# Altium PCB shy-mirror-sensor-revA.PcbDoc
Units mil, origin at the board's own origin, x right, y up, seen from the top; angles counter-clockwise.
Board outline 375 x 590 mil, 2 copper layers (Top Layer, Bottom Layer); 2 components, 6 nets, 14 pads, 0 vias.
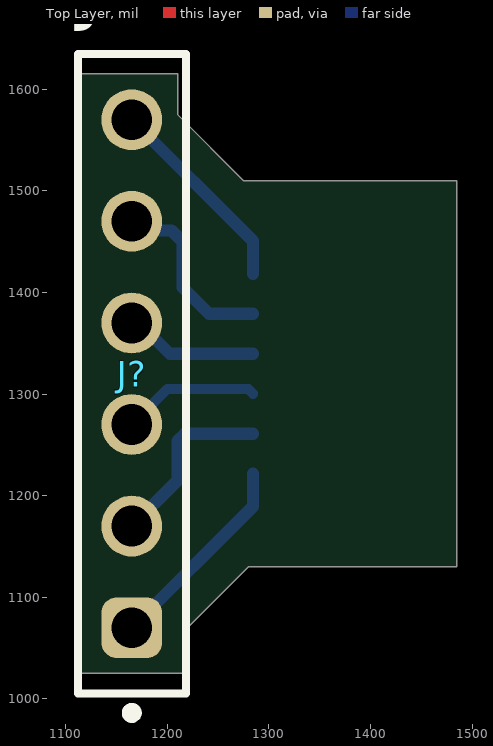
[diagram p0: Top Layer view]
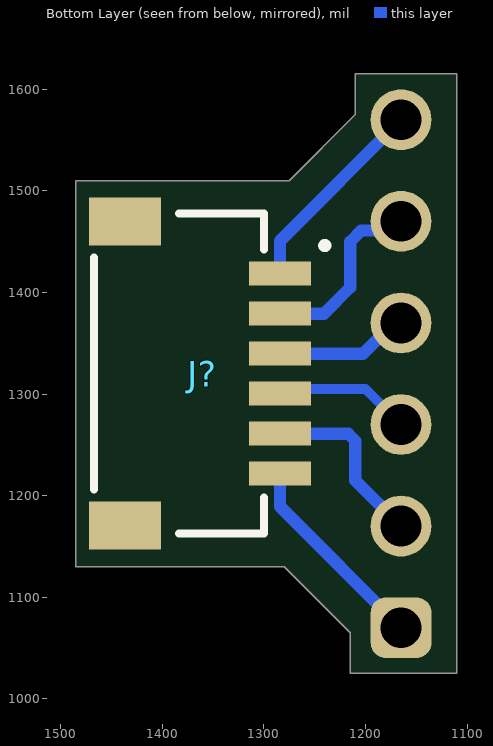
[diagram p1: Bottom Layer view, seen from below]

## Layer stack, top to bottom
Top Solder: solder mask 0.4, Solder Resist, Dk 3.5
Top Layer: signal copper 1.4
Dielectric 1: dielectric 12.6, FR-4, Dk 4.8
Bottom Layer: signal copper 1.4
Bottom Solder: solder mask 0.4, Solder Resist, Dk 3.5

## Board outline
1110,1025 1110,1615 1210,1615 1210,1575 1275,1510 1485,1510 1485,1130 1280,1130 1215,1065 1215,1025

## Design rules (kind name [scope] priority, off if disabled: settings)
Clearance [All] p1: gap=10 ignorepadtopadclearanceinfootprint=FALSE except(0: Arc-Hole Track-Hole SMDPad-Hole THPad-Hole Via-Hole Fill-Hole Poly-Hole Region-Hole Text-Hole)
PolygonConnect [All] p1: connectstyle=Relief reliefconductorwidth=10 reliefentries=4 polygonreliefangle="90 Angle" airgapwidth=10
RoutingVias [All] p1: holewidth=28 width=50 viastyle="Through Hole" minholewidth=12 minwidth=24 maxholewidth=28 maxwidth=50
SolderMaskExpansion [All] p1: expansion=4 istentingtop=FALSE
Width [All] p1: maxlimit=50 minlimit=10 preferedwidth=12 minimp=50.000000 maximp=50.000000 favimp=50.000000
30 further rules are at their usual default settings.

## Classes and differential pairs
component class shy-mirror-sensor-rev: J?

## Components (designator, comment, footprint, x,y, rotation, side; value= is the part's Value field where it differs from the comment)
J? "61300611821" 61300611821 1165,1320 r90 top
J? "SM06B-SRSS-TB__LF__SN_" SM06B-SRSS-TB 1300,1320 r270 bottom

## Footprints (in the part's own frame and the unit in brackets; to place one, negate y for a bottom-side part, rotate by r counter-clockwise, add the part's x,y. Pads: shape width x height; smd on the part's side, far side on the other; paste and mask are expansions set on the pad)
61300611821 [mm] "Socket Header, Pitch 2.54 mm, THT, Vertical, single row, 6p"
  rrect50% 1.52x1.52 hole 1.02: 1(-6.35,0)
  round 1.52 hole 1.02: 2(-3.81,0) 3(-1.27,0) 4(1.27,0) 5(3.81,0) 6(6.35,0)
  silkscreen extent -8.6,-1.35 8,1.35, body extent -7.87,-1.25 7.87,1.25, height 8.55
SM06B-SRSS-TB [mm]
  rect 0.6x1.55 smd: 1(-2.5,0.4) 2(-1.5,0.4) 3(-0.5,0.4) 4(0.5,0.4) 5(1.5,0.4) 6(2.5,0.4)
  rect 1.2x1.8 smd: 7(3.8,-3.475) 8(-3.8,-3.475)
  silkscreen extent -4,-4.25 4,1.59, body extent -4,-4.18 4,0.77, height 2.96

## Part data
J?: "WR-PHD Socket Header, THT, Vertical, pitch 2.54mm, 1 Row, 6P", Contact Resistance=20mOhm, Manufacturer="Wurth Elektronik", Operating Temperature Max=125°C, Operating Temperature Min=-40°C, Rated Current=3A, Withstanding Voltage=500V, Working Voltage=250V, Category="Board-to-Board Connectors", ComponentLink1Description="Website Link", ComponentLink1URL=https://www.we-online.com/redexpert/article/61300611821?ad, ComponentLink2Description="Datasheet Link", ComponentLink2URL=https://www.we-online.com/redexpert/spec/61300611821?ad, Gender="Socket Header", Manufacturer Part Number=61300611821, Match Code=WR-PHD, Mount="Through Hole", Number of Pins=6, Number of Rows=1, Orientation=Vertical, Packaging=Tray, Pitch=2.54mm
J?: "Connector", Manufacturer_Name="JST (JAPAN SOLDERLESS TERMINALS)", Manufacturer_Part_Number="SM06B-SRSS-TB (LF)(SN)", Datasheet Link=http://uk.rs-online.com/web/p/products/5468827

## Nets (pads, with @x,y where several pads share a name; then routed paths per layer and width w, separated by ;. In a path a pad name is that pad's centre, name@x,y a point inside that pad or via, vN(x,y) a via of type N, cw(c..) or ccw(c..) an arc to the next point about the centre after c; other vN are vias at no path point)
GND: J?.2@1165,1170 J?.5@1284.25,1260.94 | length 179.7
  Bottom Layer w12: J?.2@1165,1170 1210,1215 1210,1253.92 1217.03,1260.94 J?.5@1284.25,1260.94
INT: J?.2@1284.25,1379.06 J?.5@1165,1470 | length 183.3
  Bottom Layer w12: J?.5@1165,1470 1174.15,1460.85 1204.15,1460.85 1215,1450 1215,1405 1240.94,1379.06 J?.2@1284.25,1379.06
SCL: J?.3@1284.25,1339.68 J?.4@1165,1370 | length 131.8
  Bottom Layer w12: J?.4@1165,1370 1172.14,1370 1202.46,1339.68 J?.3@1284.25,1339.68
SDA: J?.3@1165,1270 J?.4@1284.25,1300.32 | length 135.7
  Bottom Layer w10: J?.3@1165,1270 1200,1305 1279.57,1305 J?.4@1284.25,1300.32
VIN: J?.1@1165,1070 J?.6@1284.25,1221.57 | length 201
  Bottom Layer w12: J?.1@1165,1070 1284.25,1189.25 J?.6@1284.25,1221.57
XSHT: J?.1@1284.25,1418.43 J?.6@1165,1570 | length 201
  Bottom Layer w12: J?.6@1165,1570 1284.25,1450.75 J?.1@1284.25,1418.43
pads on no net: J?.7 J?.8

## Silkscreen, mask and mechanical layers (free items; w line width, h text height)
Mechanical 1:
  circle w10: c1415,995 r39.37
  circle w10: c1410,1625 r39.37
  lines w10: 1275,1672.4 1275,1625 ccw(c1274.45,1625) 1274.45,1625.55 ; 1324.45,1722.4 ccw(c1324.45,1672.4) 1274.45,1672.4 1274.45,1625.55 ; 1512.6,1722.4 cw(c1512.6,1685) 1550,1685 1550,985 cw(c1500,985) 1500,935 1324.11,935 cw(c1324.11,984.7) 1274.41,984.7 1274.41,1034.41 cw(c1275,1034.41) 1275,1035 1116.93,1035 1116.93,1625.55 1274.45,1625.55
Board:
  lines w10: 1110,1025 1215,1025 1215,1065 1280,1130 1485,1130 1485,1510 1475,1510 1275,1510 1210,1575 1210,1615 1120,1615 1110,1615 1110,1530 1110,1025